# EAGLE board NeoJointV2A-180 (EAGLE 6.6.0)
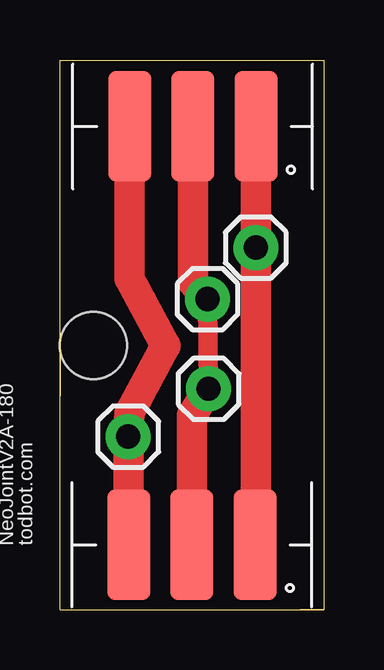
[diagram p0: board, top side]

Size 11 x 22.9 mm. Coordinates in mm from the lower left corner, seen from the top.
Outline: 10.03,0 0,0 0,8.9
Outline: 10.03,0 11,0
Outline: 0,8.9 0,11.3
Outline: 0,11.3 0,8.9
Outline: 0,8.9 0,11.3
Outline: 0,11.3 0,8.9
Outline: 0,8.9 0,11.3
Outline: 0,11.3 0,8.9
Outline: 11,0 10.03,0
Outline: 11,0 11,2.7 11,16 11,22.9 0,22.9 0,14.2 0,11.3
Outline: 0,8.9 0,11.3
Copper layers (1*16): Top 0.0356mm / dielectric 1.5011mm / Bottom 0.0356mm
Design rules "LaenPCBOrder-tod": minimum track width 10mil, minimum drill 13mil, track to track 6mil, track to pad 8mil, pad to pad 8mil, via to via 8mil, smd to smd 6mil, copper to edge 15mil, drill to drill 8mil, minimum pad ring 7mil, minimum via ring 7mil, stop-mask expansion 4mil, vias tented up to drill 25mil, thermal gap 10mil
Holes 2.8 mm at 1.4,11

## Footprints (pad centres in the part's own frame; a part is rotated, then mirrored left to right if it is on the bottom)
1X01 = drill 1.016 pad 1.88: 1 0,0
LEDSTRIP-3P = smd 4.6 x 1.8: A 0,-2.65; B 0,0; C 0,2.63

## Placement (x,y rotation side)
JP1  [1X01]  8.18,15.08 0 top
JP2  [1X01]  6.16,12.94 0 top
JP3  [1X01]  2.85,7.21 0 top
JP4  [1X01]  6.2,9.2 0 top
U$1  LED_STRIP_3P  [LEDSTRIP-3P]  5.5,2.7 90 top
U$2  LED_STRIP_3P  [LEDSTRIP-3P]  5.54,20.13 90 top

## Library data of the parts
JP1-JP4 = SparkFun-Connectors
U$1 U$2 = todstuff

## Nets
A: JP1.1 U$1.A U$2.A
B: JP2.1 JP4.1 U$1.B U$2.B
C: JP3.1 U$1.C U$2.C

## Tracks (layer width: path | path; a pad name or v marks a point on that pad's centre or on a via)
A
  Top 1.27: U$1.A 8.18,2.73 JP1.1 8.18,20.12 U$2.A
B
  Top 0.813: JP2.1 JP4.1
  Top 1.27: U$2.B 5.56,20.12 5.56,13.64 JP2.1 | U$1.B 5.5,8.1 JP4.1
C
  Top 1.27: U$1.C 2.87,5.81 2.87,7.18 arc90 JP3.1 | U$2.C 2.91,13.79 4.4,11 2.9,8.2 JP3.1 | 2.8,7.25 JP3.1

## Text on the board
tPlace: NeoJointV2A-180 | todbot.com